# Altium PCB WackyRacerPCB.PcbDoc
Units mm, origin at the board's own origin, x right, y up, seen from the top; angles counter-clockwise.
Board outline 64 x 85 mm, 4 copper layers (Top Layer, Int1 (GND), Int2 (PWR), Bottom Layer), stack 1.369 mm thick; 109 components, 76 nets, 333 pads, 112 vias.
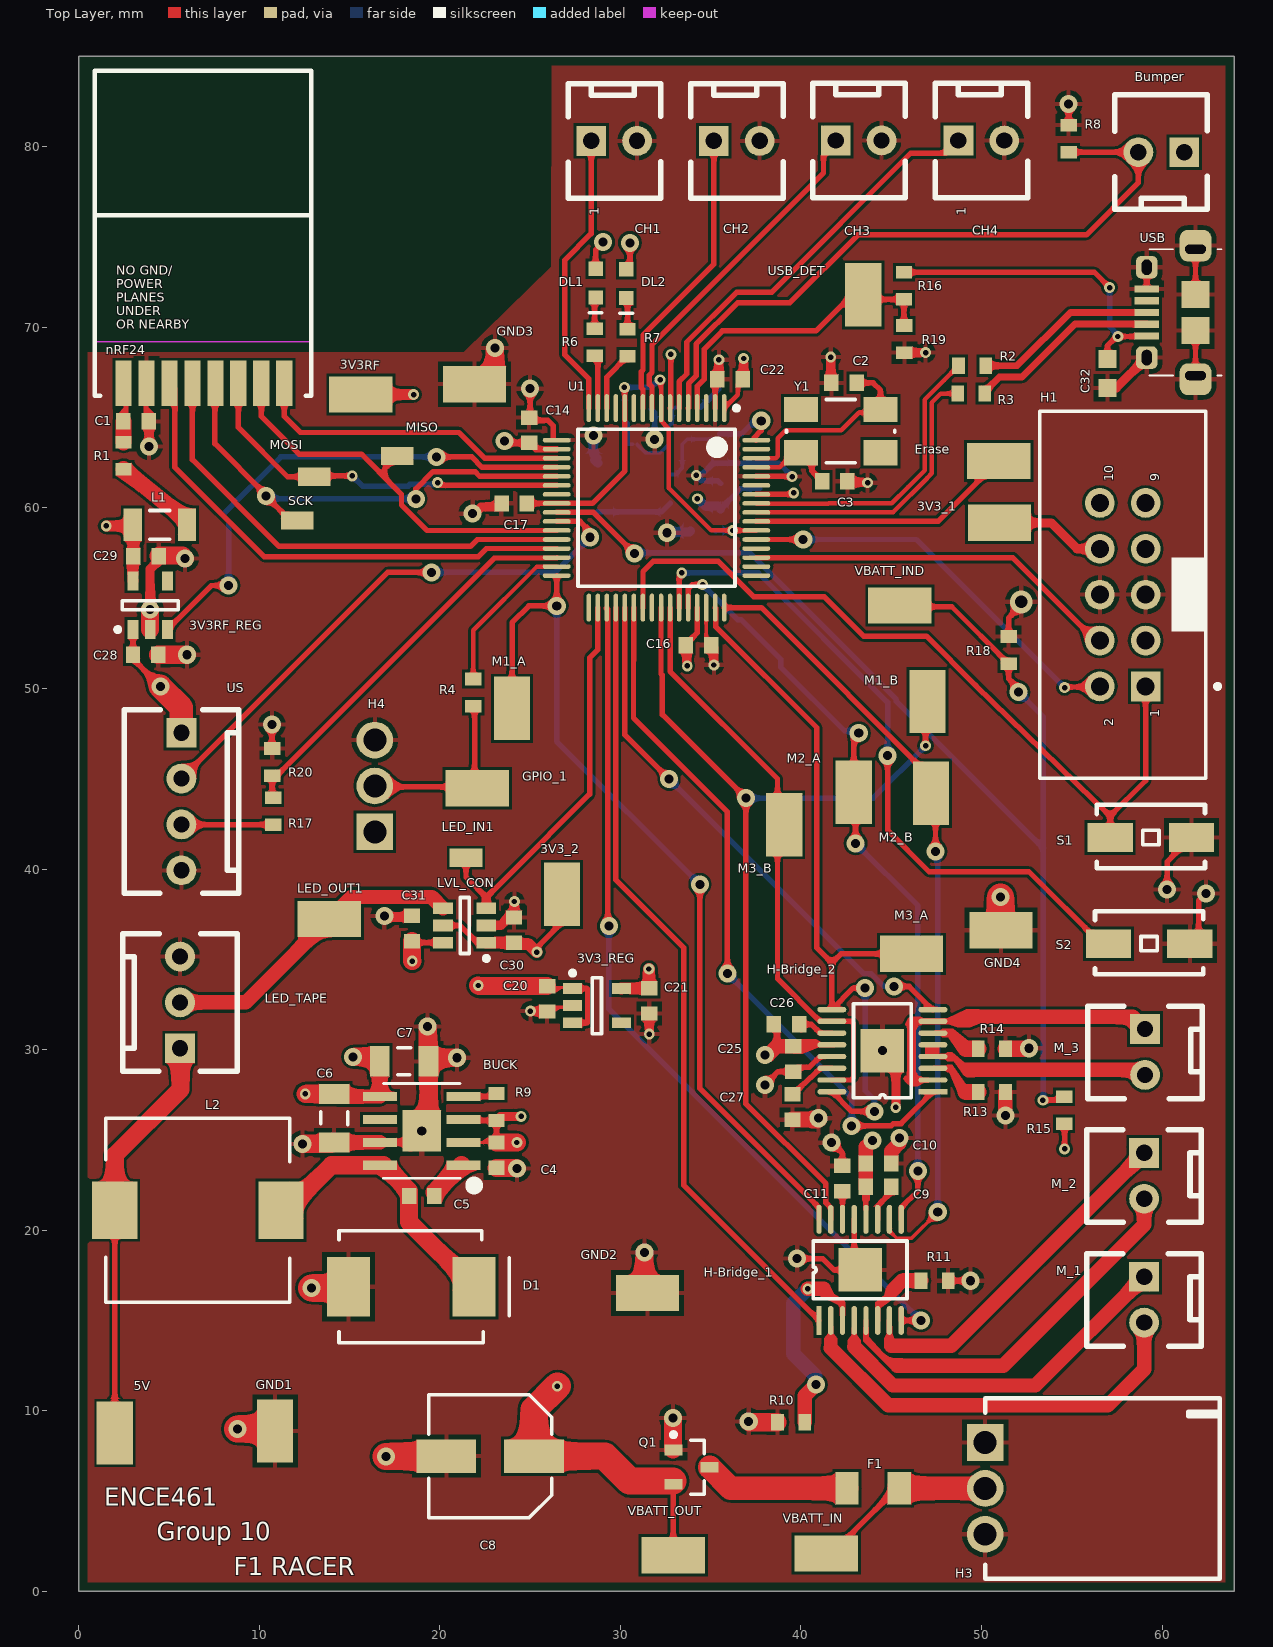
[diagram p0: Top Layer view]
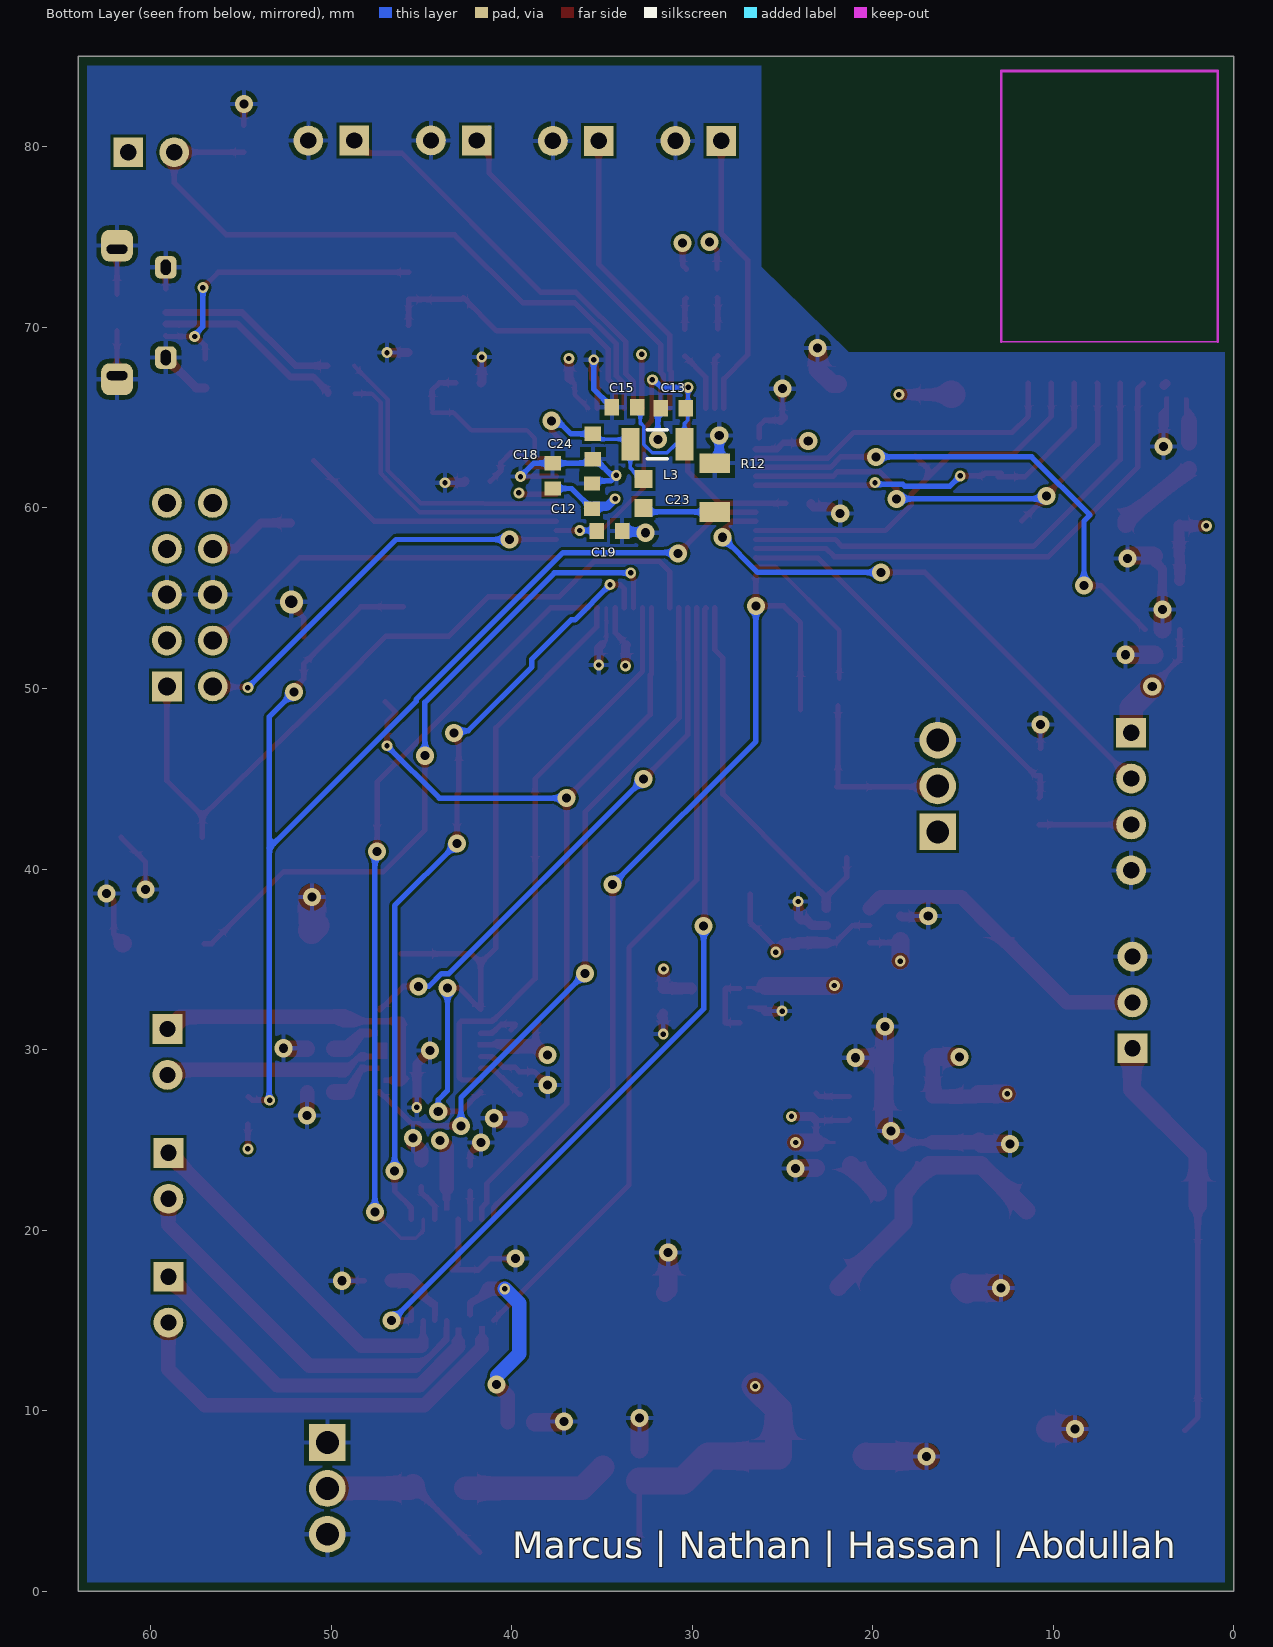
[diagram p1: Bottom Layer view, seen from below]
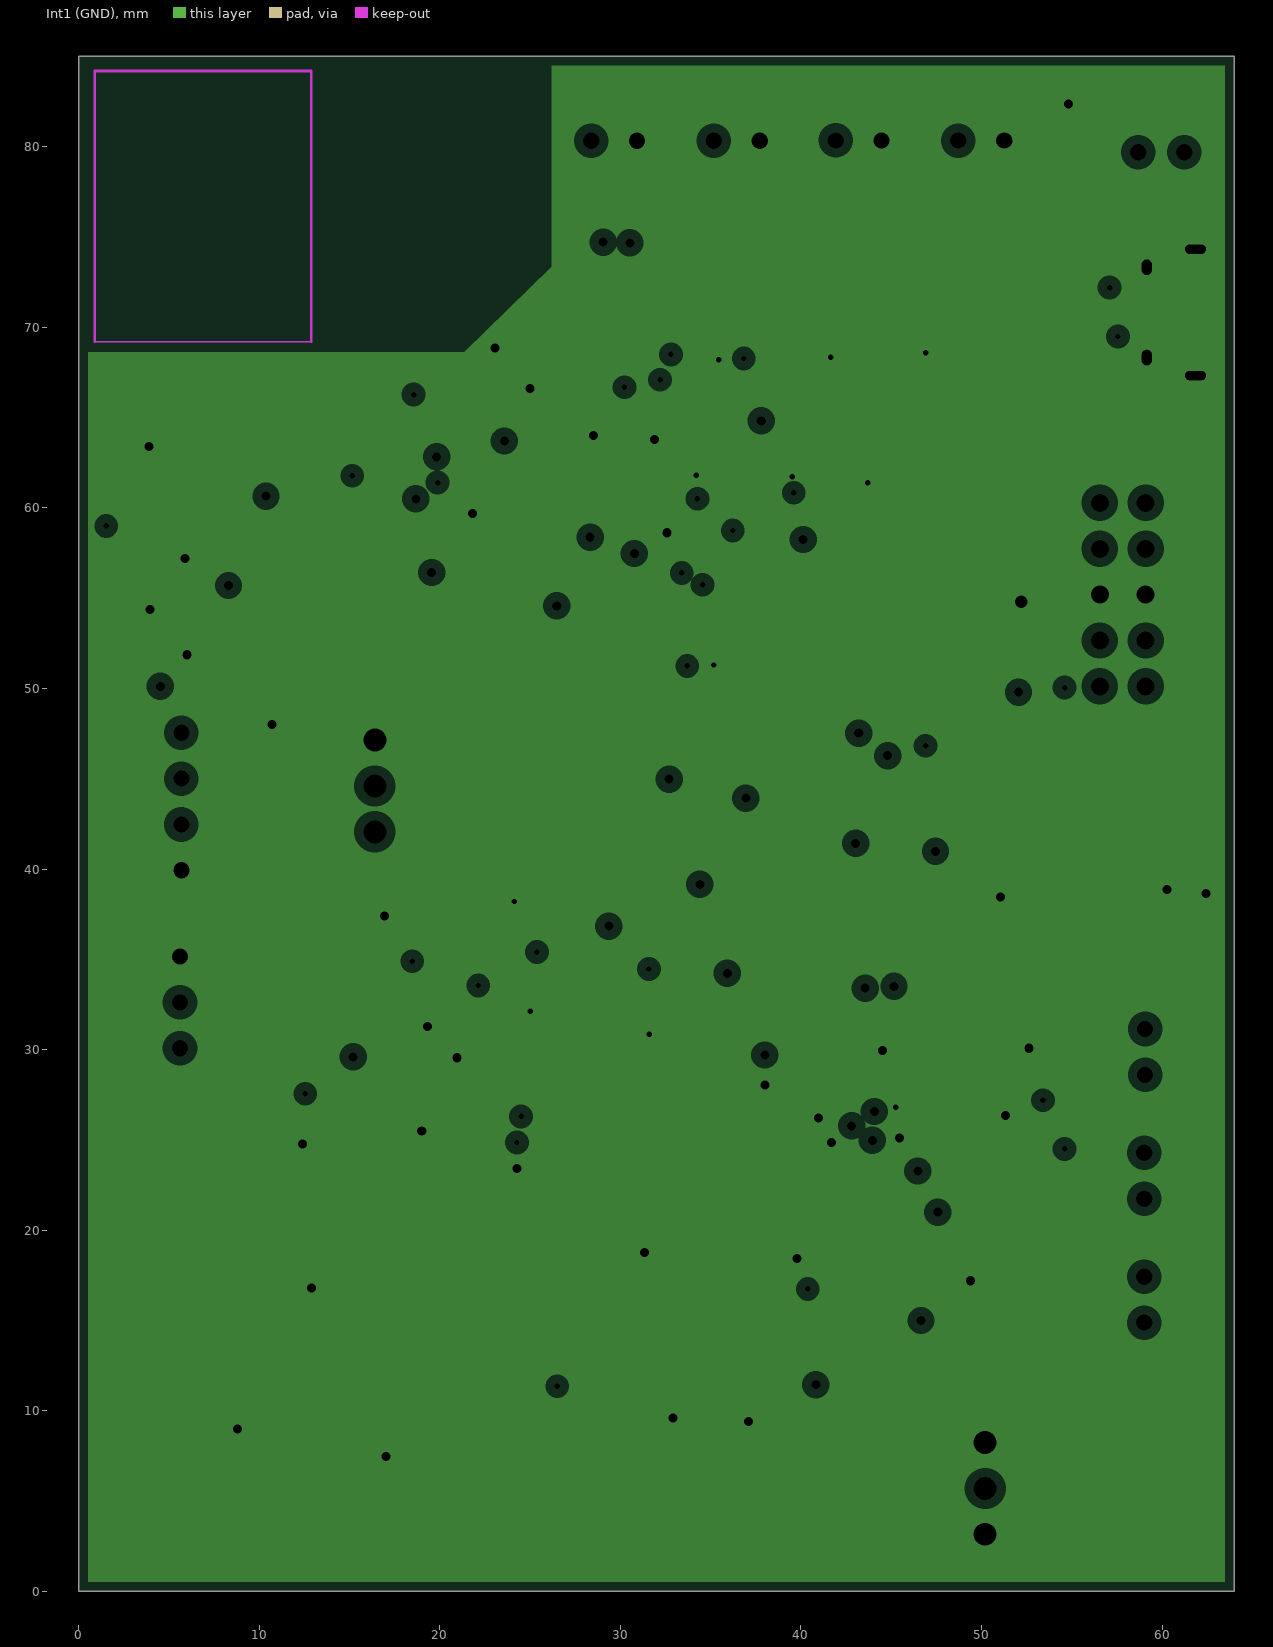
[diagram p2: Int1 (GND), clearances drawn from the general rule]
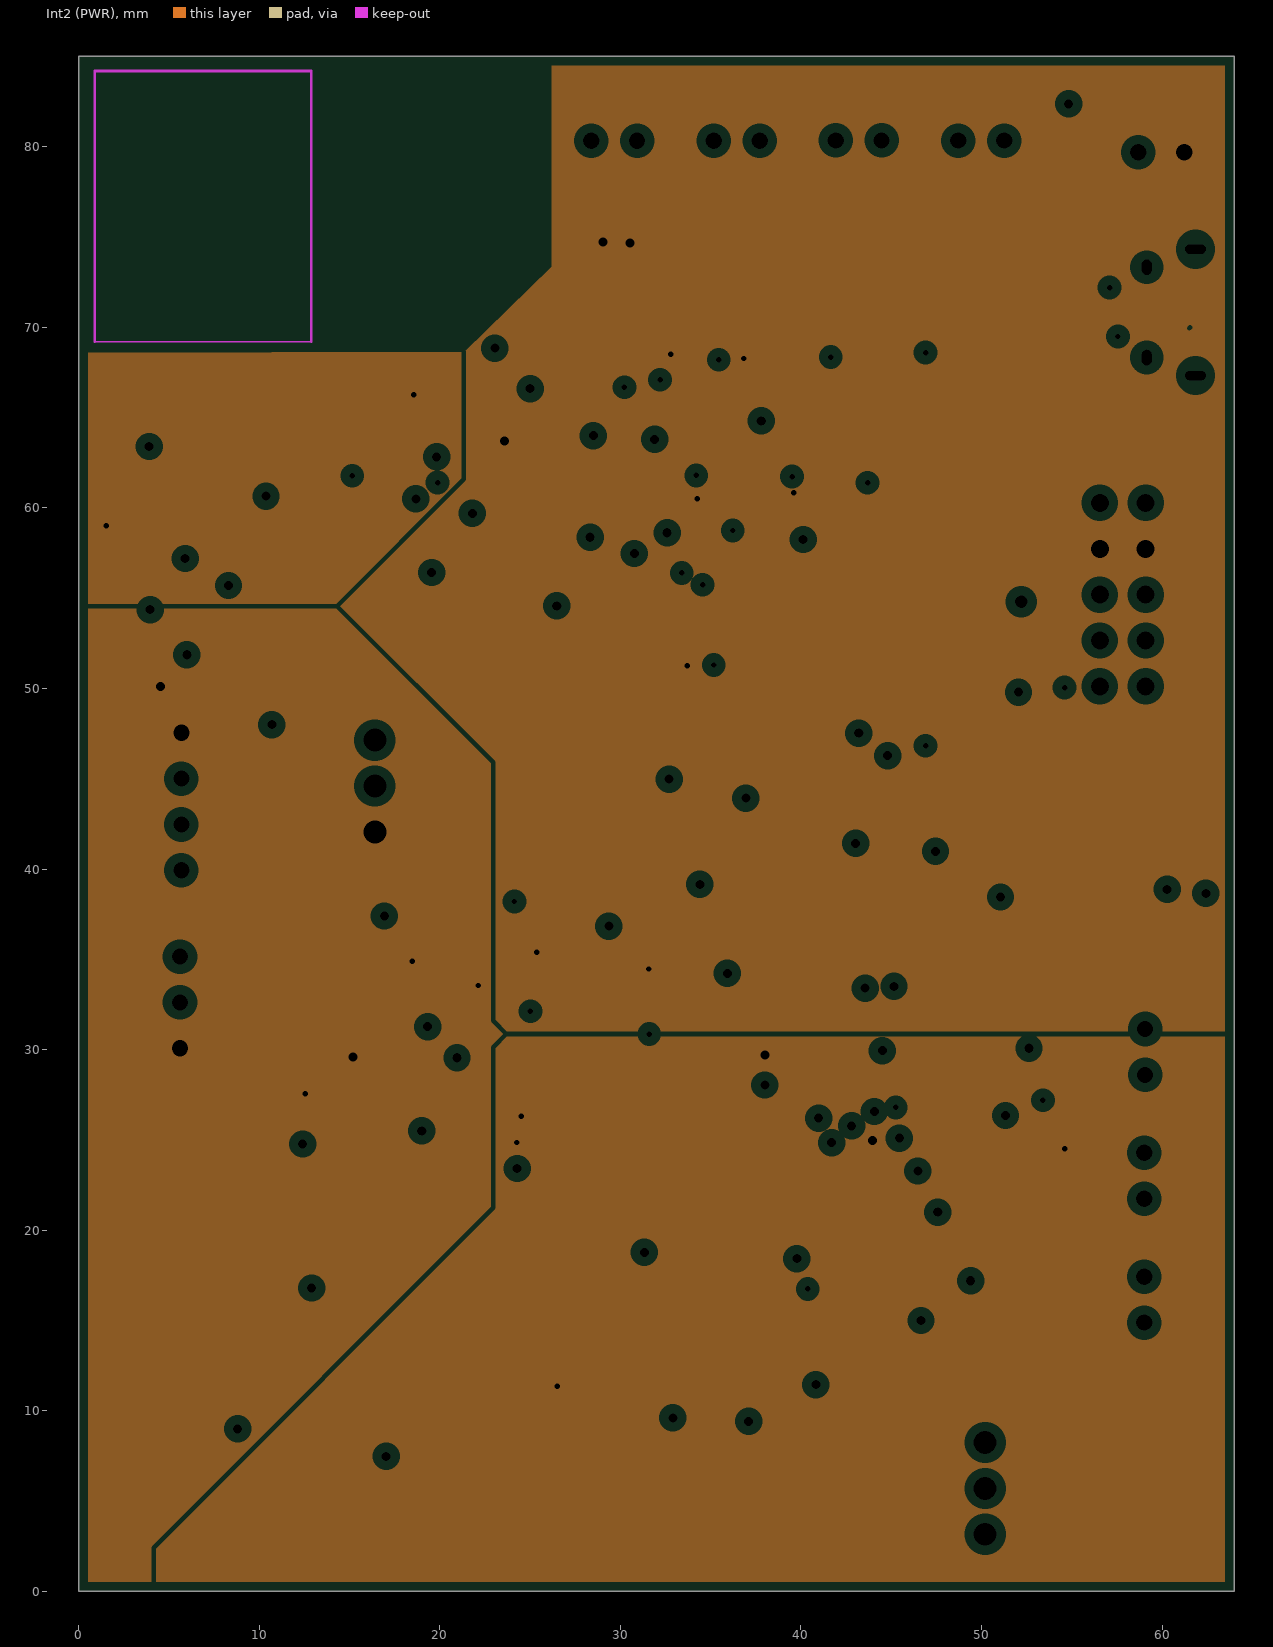
[diagram p3: Int2 (PWR), clearances drawn from the general rule]

## Layer stack, top to bottom
Top Solder: solder mask 0.0254, SM-001, Dk 4
Top Layer: signal copper 0.035
Dielectric 1: prepreg 0.1295, PP-017, Dk 4.3
Dielectric 2: prepreg 0.1295, PP-017, Dk 4.3
Int1 (GND): plane copper 0.035, net GND
Dielectric 3: core 0.7112, Core-039, Dk 4.8
Int2 (PWR): plane copper 0.035, net (Multiple Nets)
Dielectric 4: prepreg 0.1295, PP-017, Dk 4.3
Dielectric 5: prepreg 0.1295, PP-017, Dk 4.3
Bottom Layer: signal copper 0.035
Bottom Solder: solder mask 0.0254, SM-001, Dk 4

## Board outline
0,85 64,85 64,0 0,0 0,85

## Design rules (kind name [scope] priority, off if disabled: settings)
BoardOutlineClearance [All] p1: gap=0.5
Clearance Min_Clearance_Circuit_Labs [All] p1: gap=0.15
DiffPairsRouting [All] p1: maxlimit=0.254 minlimit=0.254 mostfreqgap=0.254 toplayer_minwidth=0.381 toplayer_maxwidth=0.381 toplayer_prefwidth=0.381 bottomlayer_minwidth=0.381 bottomlayer_maxwidth=0.381 bottomlayer_prefwidth=0.381 maxuncoupledlength=12.7
FanoutControl Fanout_BGA [IsBGA] p1 off: bgadir=Out bgaviamode=Centered fanoutstyle=Auto fanoutdirection=Alternating viagrid=0.025 // Fanout_BGA (Default Rule)
HoleSize [All] p1: absolutevalues=TRUE maxlimit=10 minlimit=0.3 maxpercent=80.000 minpercent=20.000
MinimumAnnularRing [All] p1: minimumring=0.1
MinimumSolderMaskSliver [All] p1: minsoldermaskwidth=0.1
NetAntennae [All] p1: netantennaetolerance=1
PasteMaskExpansion [All] p1 off: expansion=0.2
PlaneClearance [All] p1: clearance=0.508
PlaneConnect [All] p1: planeconnectstyle=Relief reliefexpansion=0.508 reliefentries=4 reliefconductorwidth=0.254 reliefairgap=0.254
PolygonConnect [All] p1: connectstyle=Relief reliefconductorwidth=0.254 reliefentries=4 polygonreliefangle="90 Angle" airgapwidth=0.254
RoutingVias [All] p1: holewidth=0.5 width=1 viastyle="Through Hole" minholewidth=0.3 minwidth=0.6 maxholewidth=1 maxwidth=2
SMDNeckDown [All] p1 off: percent=50.000
SMDToCorner [All] p1: distance=98425
SMDToPlane [All] p1: distance=1968504
SilkToSolderMaskClearance SilkscreenOverComponentPads [IsPad] p1: minsilkscreentomaskgap=0.254 clearancetoexposedcopper=TRUE
SolderMaskExpansion [All] p1: expansion=0.102
ViasUnderSMD [All] p1: allowed=FALSE
Width [All] p1: maxlimit=2 minlimit=0.15 preferedwidth=0.3
21 further rules are at their usual default settings.

## Classes and differential pairs
component class TestPoints: 3V3_2 3V3RF 5V GND1 GND2 GND3 GND4 GPIO_1 LED_IN1 LED_OUT1 M1_A M1_B M2_A M2_B M3_A M3_B MISO MOSI SCK USB_DET VBATT_IN VBATT_IND VBATT_OUT
component class Power: 3V3_REG 3V3RF_REG BUCK C4 C5 C6 C7 C8 C9 C10 C11 C12 C13 C14 C15 C16 C17 C18 C19 C20 C21 C22 C23 C24 C25 C26 C27 C28 C29 C30 C31 D1 F1 H-Bridge_1 H-Bridge_2 L2 L3 LVL_CON Q1 R9 R10 R11 R12 R13 R14 R15 R16 R17 R18 R19 R20
component class MCU: 3V3_1 C1 C2 C3 C32 DL1 DL2 Erase H1 L1 nRF24 R1 R2 R3 R4 R6 R7 S1 S2 U1 USB Y1
component class Headers: Bumper CH1 CH2 CH3 CH4 H3 H4 LED_TAPE M_1 M_2 M_3 R8 US
differential pair D: +D_P -D_N

## Components (designator, comment, footprint, x,y, rotation, side; value= is the part's Value field where it differs from the comment)
3V3_1 "TP" TP_1206 51,59.175 r0 top
3V3_2 "TP" TP_1206 26.775,38.6 r270 top
3V3_REG "CAT6219-330TDGT3" SOT95P280X145-5N 28.702,32.436 r0 top
3V3RF "TP" TP_1206 15.625,66.275 r0 top
3V3RF_REG "CAT6219-330TDGT3" SOT95P280X145-5N 3.962,54.614 r90 top
5V "TP" TP_1206 2,8.775 r270 top
BUCK "ADP2302ARDZ-5.0 BUCK" RD_8_1 19,25.5 r180 top locked
Bumper "2 Pin Molex KK HDR" MOLEX_KK_2_HDR 61.225,79.7 r180 top
C1 "10uF" CAPC1608L 3.175,64.795 r180 top
C2 "27nF" CAPC1608L 42.388,66.926 r0 top
C3 "27nF" CAPC1608L 41.875,61.475 r180 top
C4 "10uF" CAPC1608L 23.139,24.155 r90 top
C5 "100nF" CAPC1608L 19,21.9 r180 top
C6 "22uF" CAPC3216L 14.15,26.2 r90 top
C7 "22uF" CAPC3216L 18.025,29.35 r180 top
C8 "100µF/25V" CAPAE6666X77M 22.791,7.486 r180 top
C9 "10nF" CAPC1608L 44.3,22.4 r180 top
C10 "10uF" CAPC1608L 44.3,23.7 r180 top
C11 "2.2uF" CAPC1608L 42.291,22.86 r90 top
C12 "100nF" CAPC1608L 35.55,60.65 r270 bottom
C13 "100nF" CAPC1608L 31.05,65.525 r0 bottom
C14 "100nF" CAPC1608L 24.95,64.3 r270 top
C15 "100nF" CAPC1608L 33.75,65.575 r0 bottom
C16 "100nF" CAPC1608L 34.325,52.4 r180 top
C17 "100nF" CAPC1608L 24.125,60.25 r180 top
C18 "100nF" CAPC1608L 37.725,61.775 r270 bottom
C19 "100nF" CAPC1608L 34.575,58.725 r180 bottom
C20 "1uF" CAPC1608L 25.944,32.812 r270 top
C21 "1uF" CAPC1608L 31.6,32.7 r90 top
C22 "100nF" CAPC1608L 36.075,67.125 r0 top
C23 "4.7uF" CAPC1608N 32.7,60.8 r90 bottom
C24 "100nF" CAPC1608L 35.5,63.4 r90 bottom
C25 "10uF" CAPC1608L 39.573,29.478 r90 top
C26 "100nF" CAPC1608L 39.2,31.4 r180 top
C27 "2.2uF" CAPC1608L 39.525,26.825 r270 top
C28 "1uF" CAPC1608L 3.708,51.867 r0 top
C29 "1uF" CAPC1608L 3.734,57.328 r180 top
C30 "100nF" CAPC1608L 24.108,36.616 r270 top
C31 "100nF" CAPC1608L 18.454,36.708 r270 top
C32 "4.7uF" CAPC1608N 56.975,67.45 r90 top
CH1 "2 Pin Molex KK HDR" MOLEX_KK_2_HDR 28.385,80.325 r0 top
CH2 "2 Pin Molex KK HDR" MOLEX_KK_2_HDR 35.175,80.325 r0 top
CH3 "2 Pin Molex KK HDR" MOLEX_KK_2_HDR 41.925,80.35 r0 top
CH4 "2 Pin Molex KK HDR" MOLEX_KK_2_HDR 48.717,80.34 r0 top
D1 "SCHOTTKY 30V 4A" SMC 18.415,16.866 r0 top
DL1 "Dark Green" WL-SMCW0603 28.625,71.65 r90 top
DL2 "Red" WL-SMCW0603 30.325,71.625 r90 top
Erase "TP" TP_1206 50.95,62.6 r0 top
F1 "5A" RESC3216N 44,5.7 r180 top
GND1 "TP" TP_1206 10.883,8.883 r270 top
GND2 "TP" TP_1206 31.495,16.515 r0 top
GND3 "TP" TP_1206 21.925,66.85 r0 top
GND4 "TP" TP_1206 51.078,36.611 r0 top
GPIO_1 "TP" TP_1206 22.075,44.475 r180 top
H1 "Header 5X2 Vert" IDC2.54-V10D 57.82,55.195 r90 top
H3 "Battery_HEADER_3pin" BATT_HEADER_3POS 50.2,5.7 r270 top
H4 "HEADER_3" HEADER_3POS 16.4,44.6 r90 top
H-Bridge_1 "DRV8833" HTSOP16#1 41,15 r90 top locked
H-Bridge_2 "DRV8833" HTSOP16#2 47.309,27.667 r180 top
L1 "1A max, Idc 0.3R," INDC3216L 4.496,59.055 r180 top
L2 "IND 5.2UH 6A" INDUCTOR5u2 6.6,21.1 r180 top
L3 "1A max, Idc 0.3R," INDC3216L 31.925,63.525 r180 bottom
LED_IN1 "=Value" TP_0603 21.45,40.625 r180 top
LED_OUT1 "TP" TP_1206 13.875,37.225 r0 top
LED_TAPE "3 Pin Molex KK Hdr" MOLEX_KK_3_HDR 5.613,30.074 r90 top
LVL_CON "SN74LVC1T45" SOT23-6_N 21.375,36.875 r180 top
M1_A "TP" TP_1206 24,48.9 r270 top
M1_B "TP" TP_1206 47,49.275 r270 top
M2_A "TP" TP_1206 42.925,44.25 r270 top
M2_B "TP" TP_1206 47.2,44.2 r270 top
M3_A "TP" TP_1206 46.126,35.306 r0 top
M3_B "TP" TP_1206 39.075,42.45 r90 top
M_1 "2 Pin Molex KK HDR" MOLEX_KK_2_HDR 59.004,17.424 r270 top
M_2 "2 Pin Molex KK HDR" MOLEX_KK_2_HDR 59.004,24.282 r270 top
M_3 "2 Pin Molex KK HDR" MOLEX_KK_2_HDR 59.055,31.14 r270 top
MISO "TP_0603" TP_0603 17.65,62.875 r180 top
MOSI "=Value" TP_0603 13.05,61.725 r180 top
nRF24 "nRF24 SMD" NRF24 0.886,66.2 r0 top
Q1 "SSM3J328R,LF" SOT23_L 33.942,6.876 r0 top
R1 "10R" RESC1608L 2.489,62.89 r270 top
R2 "27R" RESC1608L 49.475,67.875 r180 top
R3 "27R" RESC1608L 49.425,66.332 r180 top
R4 "100R" RESC1608L 21.85,49.775 r270 top
R6 "100R" RESC1608L 28.575,69.175 r270 top
R7 "1K3" RESC1608L 30.4,69.15 r270 top
R8 "100K" RESC1608L 54.825,80.45 r270 top
R9 "100K" RESC1608L 23.139,26.822 r270 top
R10 "0R" RESC1608L 39.453,9.365 r180 top
R11 "0R" RESC1608L 47.4,17.2 r180 top
R12 "1R" RESC3216L 28.75,61.125 r90 bottom
R13 "0R" RESC1608L 50.575,27.65 r0 top
R14 "0R" RESC1608L 50.575,30.05 r0 top
R15 "470K" RESC1608L 54.575,26.649 r270 top
R16 "270K" RESC1608L 45.7,72.3 r90 top
R17 "10K" RESC1608L 10.77,43.205 r270 top
R18 "270K" RESC1608L 51.5,52.125 r270 top
R19 "470K" RESC1608L 45.725,69.35 r90 top
R20 "10K" RESC1608L 10.719,45.923 r270 top
S1 "EVQPNF05M" EVQPNF05M 59.375,41.75 r0 top
S2 "EVQPNF05M" EVQPNF05M 59.284,35.865 r0 top
SCK "=Value" TP_0603 12.1,59.3 r180 top
U1 "ATSAM4S8BA-ANR" LQFP64_L 32,60 r270 top locked
US "Ultrasonic Sensor Connector" MOLEX_KK_4_HDR 5.69,47.549 r270 top
USB "JS_USB_MICRO_B" FCI_USB_10118194-0001LF 63.3,70.825 r90 top
USB_DET "TP" TP_1206 43.45,71.8 r90 top
VBATT_IN "TP" TP_1206 41.4,2.1 r180 top
VBATT_IND "TP" TP_1206 45.475,54.6 r180 top
VBATT_OUT "TP" TP_1206 32.926,1.999 r180 top
Y1 "12MHz" 6.0X3.5-4 42.2,64.25 r0 top

## Footprints (in the part's own frame and the unit in brackets; to place one, negate y for a bottom-side part, rotate by r counter-clockwise, add the part's x,y. Pads: shape width x height; smd on the part's side, far side on the other; paste and mask are expansions set on the pad)
6.0X3.5-4 [mm] "4 SMD 6.0X3.5 mm No Lead Crystal"
  rect 1.9x1.4 smd: 1(-2.2,-1.2) 2(2.2,-1.2) 3(2.2,1.2) 4(-2.2,1.2)
  silkscreen extent -3,-1.75 3,1.75, body extent -3,-1.75 3,1.75, height 1.2
BATT_HEADER_3POS [mil]
  rect 80x80 hole 50: 1(-100,0)
  round 80 hole 50: 2(0,0) 3(100,0)
  silkscreen extent -197,0 197,512
CAPAE6666X77M [mm] "Aluminum Electrolytic Capacitor, Body 6.60x6.60x7.70mm, IPC Low Density"
  rect 3.3x1.85 smd: 1(2.425,0) 2(-2.425,0)
  silkscreen extent -3.4,-3.4 3.4,3.4, body extent -3.4,-3.4 3.4,3.4, height 7.7
CAPC1608L [mm] "Chip Capacitor, Body 1.6x0.8mm, IPC High Density"
  rect 0.8x0.9 smd: 1(-0.7,0) 2(0.7,0)
  body extent -0.87,-0.48 0.87,0.48, height 0.85
CAPC1608N [mm] "Chip Capacitor, Body 1.6x0.8mm, IPC Medium Density"
  rect 1x1 smd: 1(-0.8,0) 2(0.8,0)
  body extent -0.87,-0.48 0.87,0.48, height 0.85
CAPC3216L [mm] "Chip Capacitor, Body 3.2x1.6mm, IPC High Density"
  rect 1.1x1.7 smd: 1(-1.35,0) 2(1.35,0)
  silkscreen extent -0.35,-0.75 0.35,0.75, body extent -1.7,-0.9 1.7,0.9, height 1.35
EVQPNF05M [mm] "Panansonic light touch SMD push button switch"
  rect 2.5x1.6 smd: 1(-2.25,0) 2(2.25,0)
  silkscreen extent -3,-1.7 3,1.8, body extent -3,-1.7 3,1.8, height 5
FCI_USB_10118194-0001LF [mm] "Micro USB B Type Receptacle"
  rect 0.4x1.35 smd mask+0.07: 1(-1.3,4.15) 2(-0.65,4.15) 3(0,4.15) 4(0.65,4.15) 5(1.3,4.15)
  rrect50% 1.75x1.75 hole 0.5 slot 1.15 at 90 deg copper offset -0.2,0 paste+0 mask+0.1: 6(-3.5,1.45)
  rrect50% 1.25x1.2 hole 0.55 slot 0.85 at 0 deg: 6(-2.5,4.15) 6(2.5,4.15)
  rect 1.5x1.55 smd: 6(-1,1.45) 6(1,1.45)
  rrect50% 1.75x1.75 hole 0.5 slot 1.15 at 90 deg copper offset 0.2,0 paste+0 mask+0.1: 6(3.5,1.45)
  silkscreen extent -3.5,0 3.5,4
HEADER_3POS [mil]
  rect 80x80 hole 50: 1(-100,0)
  round 80 hole 50: 2(0,0) 3(100,0)
HTSOP16#1 [mm]
  rect 1.6x0.3 smd: 1(0,0)
  oval 1.6x0.3 smd: 2(0,-0.65) 3(0,-1.3) 4(0,-1.95) 5(0,-2.6) 6(0,-3.25) 7(0,-3.9) 8(0,-4.55) 9(5.6,-4.55) 10(5.6,-3.9) 11(5.6,-3.25) 12(5.6,-2.6) 13(5.6,-1.95) 14(5.6,-1.3) 15(5.6,-0.65) 16(5.6,0)
  rect 2.4x2.4 smd paste-0.5: 17(2.8,-2.275)
  silkscreen extent 1.2,-4.88 4.4,0.33
HTSOP16#2 [mm]
  rect 1.6x0.3 smd: 1(0,0)
  oval 1.6x0.3 smd: 2(0,-0.65) 3(0,-1.3) 4(0,-1.95) 5(0,-2.6) 6(0,-3.25) 7(0,-3.9) 8(0,-4.55) 9(5.6,-4.55) 10(5.6,-3.9) 11(5.6,-3.25) 12(5.6,-2.6) 13(5.6,-1.95) 14(5.6,-1.3) 15(5.6,-0.65) 16(5.6,0)
  rect 2.4x2.4 smd: 17(2.8,-2.275)
  silkscreen extent 1.2,-4.88 4.4,0.33
IDC2.54-V10D [mm] "Connector; IDC, Low Profile Male Header, Thru-Hole; 10 Position; Vertical; Pitch 2.54 mm; Body 20.32 x 9.2 x 9.45 mm (LxWxH)"
  rect 1.65x1.65 hole 1: 1(-5.08,-1.27)
  round 1.65 hole 1: 2(-5.08,1.27) 3(-2.54,-1.27) 4(-2.54,1.27) 5(0,-1.27) 6(0,1.27) 7(2.54,-1.27) 8(2.54,1.27) 9(5.08,-1.27) 10(5.08,1.27)
  silkscreen extent -10.16,-5.38 10.16,4.6, body extent -10.16,-4.6 10.16,4.6, height 9.45
INDC3216L [mm] "Chip Inductor, Body 3.2x1.6mm, IPC High Density"
  rect 1x1.8 smd: 1(-1.5,0) 2(1.5,0)
  silkscreen extent -0.55,-0.8 0.55,0.8, body extent -1.75,-0.95 1.75,0.95, height 1.9
INDUCTOR5u2 [mm]
  rect 2.5x3.2 smd: 1(-4.6,0) 2(4.6,0)
  silkscreen extent -5.1,-5.1 5.1,5.1
LQFP64_L [mm] "Thin QFP, 64-Leads, Body 10x10mm, Pitch 0.5mm, IPC High Density"
  oval 1.55x0.25 smd mask+0.07: 1(-5.525,3.75) 2(-5.525,3.25) 3(-5.525,2.75) 4(-5.525,2.25) 5(-5.525,1.75) 6(-5.525,1.25) 7(-5.525,0.75) 8(-5.525,0.25) 9(-5.525,-0.25) 10(-5.525,-0.75) 11(-5.525,-1.25) 12(-5.525,-1.75) 13(-5.525,-2.25) 14(-5.525,-2.75) 15(-5.525,-3.25) 16(-5.525,-3.75) 33(5.525,-3.75) 34(5.525,-3.25) 35(5.525,-2.75) 36(5.525,-2.25) 37(5.525,-1.75) 38(5.525,-1.25) 39(5.525,-0.75) 40(5.525,-0.25) 41(5.525,0.25) 42(5.525,0.75) 43(5.525,1.25) 44(5.525,1.75) 45(5.525,2.25) 46(5.525,2.75) 47(5.525,3.25) 48(5.525,3.75)
  oval 0.25x1.55 smd mask+0.07: 17(-3.75,-5.525) 18(-3.25,-5.525) 19(-2.75,-5.525) 20(-2.25,-5.525) 21(-1.75,-5.525) 22(-1.25,-5.525) 23(-0.75,-5.525) 24(-0.25,-5.525) 25(0.25,-5.525) 26(0.75,-5.525) 27(1.25,-5.525) 28(1.75,-5.525) 29(2.25,-5.525) 30(2.75,-5.525) 31(3.25,-5.525) 32(3.75,-5.525) 49(3.75,5.525) 50(3.25,5.525) 51(2.75,5.525) 52(2.25,5.525) 53(1.75,5.525) 54(1.25,5.525) 55(0.75,5.525) 56(0.25,5.525) 57(-0.25,5.525) 58(-0.75,5.525) 59(-1.25,5.525) 60(-1.75,5.525) 61(-2.25,5.525) 62(-2.75,5.525) 63(-3.25,5.525) 64(-3.75,5.525)
  silkscreen extent -5.65,-4.35 4.35,4.55, body extent -5,-5 5,5, height 1.6
MOLEX_KK_2_HDR [mil] "MOLEX_KK_2_HDR"
  rect 65x65 hole 35.43: 1(0,0)
  round 65 hole 35.43: 2(100,0)
  silkscreen extent -50,-125 152,125, body extent -44,-121 146,119, height 630
MOLEX_KK_3_HDR [mil] "MOLEX_KK_3_HDR"
  rect 65x65 hole 35.43: 1(0,0)
  round 65 hole 35.43: 2(100,0) 3(200,0)
  silkscreen extent -50,-125 250,125, body extent -44,-120 244,119, height 630
MOLEX_KK_4_HDR [mil] "MOLEX_KK_4_HDR"
  rect 65x65 hole 35.43: 1(0,0)
  round 65 hole 35.43: 2(100,0) 3(200,0) 4(300,0)
  silkscreen extent -50,-125 350,125, body extent -44,-119 343,119, height 630
NRF24 [mm]
  rect 0.9x2.5 smd: 1(1.6,0.7) 2(2.871,0.7) 3(4.143,0.7) 4(5.414,0.7) 5(6.686,0.7) 6(7.957,0.7) 7(9.229,0.7) 8(10.5,0.7)
  Keep-Out Layer lines w0.1: 0,3 12,3
  Keep-Out Layer lines w0.15: 0,3 0,18 12,18 12,3
  silkscreen extent 0,0 12,18
RD_8_1 [mil]
  rect 74x20 smd paste+0 mask+0: 1(-91,75) 2(-91,25) 3(-91,-25) 4(-91,-75) 5(91,-75) 6(91,-25) 7(91,25) 8(91,75)
  rect 84.65x90 smd paste-44.5 mask+0: EPAD(0,0)
  silkscreen extent -118,-104 83,123, body extent 0,0 10,10, height 10
RESC1608L [mm] "Chip Resistor, Body 1.6x0.8mm, IPC High Density"
  rect 0.7x0.9 smd: 1(-0.75,0) 2(0.75,0)
  body extent -0.85,-0.48 0.85,0.48, height 0.9
RESC3216L [mm] "Chip Resistor, Body 3.1x1.6mm, IPC High Density"
  rect 1.1x1.7 smd: 1(-1.35,0) 2(1.35,0)
  body extent -1.68,-0.87 1.68,0.87, height 2.54
RESC3216N [mm] "Chip Resistor, Body 3.2x1.6mm, IPC Medium Density"
  rect 1.3x1.8 smd: 1(-1.45,0) 2(1.45,0)
  body extent -1.68,-0.87 1.68,0.87, height 0.71
SMC [mm] "DO-214-AB/SMC; 2 C-Bend Leads; Body 7.9 x 5.9 mm, inc. leads (LxW)"
  rect 2.4x3.3 smd: 1(-3.475,0) 2(3.475,0)
  silkscreen extent -4,-3.1 5.42,3.1
SOT23-6_N [mm]
  rect 1.1x0.65 smd: 1(-1.2,0.95) 2(-1.2,0) 3(-1.2,-0.95) 4(1.2,-0.95) 5(1.2,0) 6(1.2,0.95)
  silkscreen extent -1.33,-1.55 0.25,1.95, body extent -0.9,-1.55 0.9,1.55, height 1.45
SOT23_L [mm] "SOT23, 3-Leads, Body 2.9x1.3mm, Pitch 0.95mm, Lead Span 2.3mm, IPC High Density"
  rect 1x0.6 smd: 1(-1,0.95) 2(-1,-0.95) 3(1,0)
  silkscreen extent -1.12,-1.5 0.7,1.92, body extent -0.7,-1.5 0.7,1.5, height 1.1
SOT95P280X145-5N [mm] "SOT23, 5-Leads, Body 2.90x2.80mm, Pitch 0.95mm, IPC Medium Density"
  rect 1.05x0.6 smd: 1(-1.35,0.95) 2(-1.35,0) 3(-1.35,-0.95) 4(1.35,-0.95) 5(1.35,0.95)
  silkscreen extent -1.47,-1.55 0.25,1.92, body extent -0.87,-1.52 0.87,1.53, height 1.45
TP_0603 [mm] "TestPoint 0603"
  rect 1.8x1 smd: 1(0,0)
  body extent -1,-0.6 1,0.6, height 0.9
TP_1206 [mm] "Test Point Pad"
  rect 3.5x2 smd: 1(0,0)
  body extent -1.62,-0.85 1.63,0.8, height 2
WL-SMCW0603 [mm] "2.4 x 0.8 x 0.7mm LED"
  rect 0.8x0.8 smd: 1(0,0) 2(1.6,0)
  silkscreen extent -0.85,-0.35 -0.85,0.35

## Part data
3V3_1 3V3_2 3V3RF 5V Erase GND1 GND2 GND3 GND4 GPIO_1 LED_OUT1 M1_A M1_B M2_A M2_B M3_A M3_B USB_DET VBATT_IN VBATT_IND VBATT_OUT: library part TP_1206, "Test-Point 3.3x1.6x2.1mm SMD"
3V3_REG 3V3RF_REG: library part SV_CAT6219-330TDGT3, "IC REG LIN 3.3V 500MA TSOT23-5"
BUCK: library part ADP2302ARDZ-5.0-R7, "IC REG BUCK 5V 2A 8SOIC"
Bumper CH1 CH2 CH3 CH4 M_1 M_2 M_3: library part JA_MOLEX_KK_2POS, "CONN HEADER 2POS 2.54mm VERT_Thru Hole"
C1 C4 C10 C25: library part CC_10uF_0603, "CAP CER 10UF X5R +-20% 6V3 0603"
C2 C3: library part CC_27nF_0603, "CAP CER 27nF X7R +-10% 50V 0603"
C5 C12 C13 C14 C15 C16 C17 C18 C19 C22 C24 C26 C30 C31: library part CC_100nF_0603, "CAP CER 100nF X7R +-10% 50V 0603"
C6 C7: library part CC_22uF_1206, "CAP CER 22uF Y5V -20% +80% 10V 1206"
C8: library part CA_100uF_25V, "CAP ALUM 100UF 25V 20% SMD"
C9: library part CC_10nF_0603, "CAP CER 10nF X7R +-10% 50V 0603"
C11 C27: library part CC_2.2uF_0603, "CAP CER 2.2uF X5R +-20% 10V 0603"
C20 C21 C28 C29: library part CC_1uF_0603, "CAP CER 1uF Y5V -20% +80% 16V 0603"
C23 C32: library part CC_4.7uF_0603, "CAP CER 4.7uF X5R +-20%  10V 0603"
D1: library part MBRS330T3G, "DIODE SCHOTTKY 30V 4A SMC"
DL1: library part DL_150060GS75000, "LED Dk Green 430mcd 0603 SMD"
DL2: library part DL_150060RS75000, "LED Red 250mcd 0603 SMD"
F1: library part FS_Fuse_5.0A, "Fuse 5.0A Fast Acting 1206 SMD"
H1: library part JA_HDR_IDC_5X2_VERT, "IDC Header, 2,54mm, 10-Pin, Vert"
H3 H4: "3Pin Header 2.54mm spacing"
H-Bridge_1 H-Bridge_2: "Dual H-Bridge Motor Driver 1.5A"
L1 L3: library part IN_Ferrite-Bead, "Ferrite Bead, Rdc 0.3R, Z100MHZ 600R, Imax 1A, SMD 1206"
L2: library part CDRH104RNP-5R2NC, "FIXED IND 5.2UH 6A 22 MOHM SMD"
LED_IN1 MOSI SCK: library part TP_0603, "Test Point 1.65X0.9X1.2mm SMD"
LED_TAPE: library part JA_MOLEX_KK_3POS, "CONN HEADER 3POS 2.54mm VERT_Thru Hole"
LVL_CON: "1.8V - 5V level converter"
MISO: "Test Point 1.65X0.9X1.2mm SMD"
nRF24: library part NRF24, "nRF24 SMD Module"
Q1: library part TM_SSM3J328R, "MOSFET P-CH 20V 6A SOT23-3"
R1: library part RS_10R, "RES 10 OHM 1/10W 5% 0603 SMD"
R2 R3 R15 R16: library part RS_27R, "RES 27 OHM 1/10W 5% 0603 SMD"
R4 R6: library part RS_100R, "RES 100 OHM 1/10W 5% 0603 SMD"
R7: library part RS_1K3, "RES 1.3K OHM 1/10W 5% 0603 SMD"
R8 R9: library part RS_100K, "RES 100K OHM 1/10W 5% 0603 SMD"
R10 R11 R13 R14: library part RS_0R0, "RES 0.0 OHM 1/10W 5% 0603 SMD"
R12: library part RT_1R, "RES 1R OHM 1/4W 5% 1206 SMD"
R17 R20: library part RS_10K, "RES 10.0K OHM 1/10W 5% 0603 SMD"
R18 R19: library part RS_47R, "RES 47 OHM 1/10W 5% 0603 SMD"
S1 S2: library part WS_EVQPNF05M, "Panasonic 6 x 3.5mm SMD Light Touch Switch Type SMD"
U1: library part SE_ATSAM4S16BA-MU, "IC MCU 32BIT 512KB FLASH 64LQFP"
US: library part JA_MOLEX_KK_4POS, "CONN HEADER 4POS 2.54mm VERT_Thru Hole"
USB: library part JS_USB_MICRO_B_SMT, "CONN USB MICRO B RECPT SMT R/A"
Y1: library part XT_CRYSTAL_12MHz_18pF, "CRYSTAL 12MHZ 18PF 6X3.5mm SMD"

## Via types
v1: diameter 1, hole 0.5, Top Layer to Bottom Layer, 71 vias
v2: diameter 0.6, hole 0.3, Top Layer to Bottom Layer, tented both sides, 23 vias
v3: diameter 0.6, hole 0.3, Top Layer to Bottom Layer, 17 vias
v4: diameter 1.27, hole 0.711, Top Layer to Bottom Layer, 1 vias

## Nets (pads, with @x,y where several pads share a name; then routed paths per layer and width w, separated by ;. In a path a pad name is that pad's centre, name@x,y a point inside that pad or via, vN(x,y) a via of type N, cw(c..) or ccw(c..) an arc to the next point about the centre after c; other vN are vias at no path point)
3V3: 3V3_1.1 3V3_2.1 3V3_REG.5 Bumper.1 C12.2 C14.2 C16.2 C18.2 C21.2 C22.2 C30.2 DL1.2 DL2.2 H1.7 H1.8 LVL_CON.1 LVL_CON.5 U1.1 U1.7 U1.18 U1.45 U1.58 | length 39.3
  Top Layer w0.25: U1.1 36.5,66.275 36.5,66.85 C22.2
  Top Layer w0.3: LVL_CON.5 21.125,36.875 22.075,35.925 LVL_CON.1 ; v2(25.375,35.4) 25.375,35.65 26.775,37.05 3V3_2.1 ; DL1.2 28.625,74.294 v1(29.044,74.713) ; DL2.2 30.525,73.425 v1(30.525,74.675) ; U1.7 32.8,65.575 v2(32.8,68.5) ; C16.2 33.625,52.45 34.25,53.075 U1.45 ; U1.58 39.434,60.75 39.517,60.833 v3(39.599,60.833)
  Top Layer w0.35: v1(23.571,63.703) 23.674,63.6 C14.2 25.304,63.246 U1.18@26.471,63.246
  Top Layer w0.5: C16.2 33.681,52.344 33.681,51.269 v3(33.7,51.25) ; C22.2 36.825,67.175 v3(36.825,68.275) ; 3V3_1.1@52.25,59.175 53.86,59.175 55.3,57.735 H1.8
  Top Layer w0.65: LVL_CON.1 24.108,35.925 C30.2 24.183,35.841 24.934,35.841 v2(25.375,35.4) ; 3V3_REG.5 C21.2 31.58,33.42 v2(31.58,34.463)
  Bottom Layer w0.3: C12.2 36.675,61.075 C18.2
  Bottom Layer w0.5: v3(34.265,60.503) 34.292,60.503 34.694,60.1 35.4,60.1 C12.2
3V3RF: 3V3RF.1 3V3RF_REG.5 C29.2 L1.2 | length 7.6
  Top Layer w0.6: v2(1.525,59) 2.941,59 L1.2 3.034,59.017 C29.2 2.996,57.29 2.996,55.98 3V3RF_REG.5 ; 3V3RF.1@15.675,66.275 v2(18.55,66.275)
  Top Layer w1.5: 3V3RF.1 15.65,66.3 3V3RF.1@15.675,66.275
5V: 3V3_REG.1 3V3_REG.3 3V3RF_REG.1 5V.1 BUCK.5 C6.2 C7.2 C20.1 C28.1 C31.2 H4.1 L2.2 LED_TAPE.1 LVL_CON.6 US.1 | length 48
  Top Layer w0.3: L2.2@2,21.365 2,9.633 5V.1@2.718,8.915 ; 3V3RF_REG.1 3.008,53.26 C28.1 3.008,51.627 3.585,51.05 v1(4.521,50.114) ; C6.2 C6.2@14.295,27.405 ; BUCK.5@16.675,27.419 BUCK.5 ; C31.2 18.537,35.925 LVL_CON.6 ; C20.1@25.856,33.6 C20.1 C20.1@25.948,33.508 ; 3V3_REG.3 28.177,31.486 28.177,33.386 3V3_REG.1
  Top Layer w0.8: C6.2@14.295,27.405 BUCK.5 ; BUCK.5@16.675,27.419 C7.2
  Top Layer w1: L2.2@2,21.365 2,24.149 5.639,27.788 5.639,30.048 LED_TAPE.1 ; v2(12.55,27.55) C6.2 ; v1(15.2,29.6) 16.575,29.6 16.675,29.5 C7.2 ; C31.2 18.454,34.921 v2(18.475,34.9) ; v2(22.125,33.55) 22.163,33.512 C20.1
  Top Layer w1.3: v1(4.521,50.114) 5.69,48.946 US.1
D_N: R3.1 USB.2 | length 10.6
  Top Layer w0.381: R3.1@50.175,66.325 R3.1 50.175,66.432 50.983,67.24 52.238,67.24 53.433,68.435 54.671,69.673 55.181,70.183 59.142,70.183 USB.2
D_P: R2.1 USB.3 | length 10.1
  Top Layer w0.381: R2.1 51.975,67.875 54.918,70.818 59.142,70.818 USB.3
GND: 3V3_REG.2 3V3RF_REG.2 BUCK.7 BUCK.EPAD C1.1 C2.1 C3.1 C4.1 C6.1 C7.1 C8.1 C10.1 C11.2 C12.1 C13.2 C14.1 C15.2 C16.1 C17.2 C18.1 C19.2 C20.2 C21.1 C22.1 C24.1 C25.1 C27.2 C28.2 C29.1 C30.1 C31.1 C32.1 CH1.2 CH2.2 CH3.2 CH4.2 D1.1 GND1.1 GND2.1 GND3.1 GND4.1 H1.5 H1.6 H3.1 H3.3 H4.3 H-Bridge_1.13 H-Bridge_1.17 H-Bridge_2.13 H-Bridge_2.17 LED_TAPE.3 LVL_CON.2 nRF24.2 Q1.1 R8.1 R10.2 R11.1 R12.2 R13.2 R14.2 R18.1 R19.1 R20.1 S1.2 S2.2 U1.2 U1.17 U1.46 U1.60 US.4 USB.5 USB.6 | length 124.4
  Top Layer w0.2: U1.46 34.75,52.675 C16.1
  Top Layer w0.3: v1(10.7,48) 10.7,46.692 R20.1 ; C6.1@14.1,24.9 C6.1@14.135,24.865 ; BUCK.7 BUCK.EPAD@18.365,24.865 ; C14.1@25,65.05 v1(25,66.6) ; C14.1@25.1,64.85 25.98,64.85 26.273,64.557 U1.17@26.273,63.875 ; U1.2 35.25,67 C22.1 ; U1.60@37.532,61.743 39.501,61.743 v3(39.508,61.736) ; v1(37.998,28.042) 38.735,28.778 C25.1 39.823,29.028 40.471,29.028 41.06,29.617 H-Bridge_2.13 ; v1(39.773,18.423) 41.202,18.423 41.825,17.8 H-Bridge_1.17 42.95,18.125 H-Bridge_1.13 ; v1@42,24.573 42.291,24.282 C11.2 ; R11.1 v1(49.4,17.2) ; R18.1 51.5,53.9 52.2,54.6 v4(52.2,54.8) ; v1@52.6,30.05 v1(52.625,30.075) ; R8.1 v1(54.825,82.375) ; USB.5 USB.6@59.15,73.325 ; v1(60.275,38.875) 60.275,40.4 S1.2 ; S2.2@61.519,35.88 62.025,36.386 62.025,38.25 v1(62.425,38.65) ; USB.6@61.85,67.325 USB.6@61.85,69.825 ; USB.6@61.85,71.825 USB.6@61.85,74.325
  Top Layer w0.5: nRF24.2 nRF24.2@3.875,66.782 ; C1.1 3.906,64.764 3.9,64.758 v1(3.9,63.4) ; v1(3.962,54.364) 3.962,56.614 4.284,56.935 4.284,57.178 C29.1 ; v1(16.925,37.4) 16.983,37.342 18.387,37.342 C31.1 ; v1(21.8,59.7) 21.935,59.7 22.285,60.05 23.275,60.05 23.425,60.2 C17.2 ; LVL_CON.2 23.375,36.875 23.666,37.166 23.958,37.166 C30.1 24.119,37.327 24.119,38.191 v3(24.13,38.202) ; C14.1 C14.1@25.1,64.85 ; v3(25.019,32.131) 25.028,32.122 25.934,32.122 C20.2 ; v3(31.6,30.862) 31.6,31.718 31.73,31.848 31.589,31.989 C21.1 C21.1@31.62,32.02 ; C16.1 35.175,52.25 v3(35.175,51.3) ; C22.1 35.452,67.202 v3(35.452,68.202) ; v3(41.65,68.35) 41.65,66.963 C2.1 ; C3.1 42.639,61.411 43.669,61.411 v3(43.688,61.392) ; v1(44.509,29.942) 45.25,29.201 v3(45.25,26.8) ; R19.1 v3(46.9,68.6) ; C32.1 57.473,66.65 59.148,68.325 USB.6@59.15,68.325
  Top Layer w0.8: C6.1@14.135,24.865 BUCK.7 ; C10.1@45,23.866 45,24.375 45.45,24.825 v1(45.45,25.1) ; v1(51.325,26.35) R13.2
  Top Layer w0.9: C27.2 v1@40.628,26.125 ; R14.2 v1@52.6,30.05
  Top Layer w1: 3V3RF_REG.2 v1(3.962,54.364) ; C28.2 v1(5.992,51.867) ; C29.1 4.47,57.364 5.736,57.364 v1(5.9,57.2) ; v1(12.4,24.773) 13.973,24.773 C6.1@14.1,24.9 ; BUCK.EPAD@18.365,24.865 v1(19,25.5) 19.375,25.875 C7.1 ; v1(19.325,31.275) 19.325,29.4 C7.1 ; v1(20.95,29.55) 19.425,29.55 19.375,29.5 C7.1 ; GND3.1 22.225,66.85 23.05,67.675 v1(23.05,68.85) ; C4.1 24.245,23.455 v1(24.285,23.415) ; v1(31.325,18.775) 31.325,16.685 GND2.1 ; Q1.1@32.907,7.861 v1(32.907,9.61) ; v1(37.107,9.41) 37.152,9.365 R10.2 ; v1@40.628,26.125 40.9,26.125 v1(40.975,26.2) ; CH4.2 CH4.2@51.382,80.465 ; S2.2@61.519,35.88 S2.2
  Top Layer w1.5: v1(8.8,9) GND1.1@10.2,9 ; v1(12.9,16.8) 14.674,16.8 14.774,16.7 D1.1 ; v1(17.025,7.475) 20.355,7.475 C8.1 ; v1(51.05,38.45) 51.05,37.078 50.831,36.859 GND4.1
  Bottom Layer w0.3: C13.2 31.7,65.475 31.9,65.275 v1(31.9,63.8) ; C15.2 35.452,66.577 v3(35.452,68.202) ; C12.1 35.4,61.5 34.5,61.5 v3(34.2,61.8) 34.47,61.8 35.145,62.475 C18.1 38.769,62.475 v3(39.508,61.736)
  Bottom Layer w0.5: v1(28.5,64) 28.5,62.975 28.7,62.775 28.575,62.65 R12.2 ; v1(32.588,58.623) 32.639,58.674 33.824,58.674 C19.2
  Bottom Layer w1: H1.6@56.55,55.05 H1.6
  other v1: 41.698,24.848
MCU_SLEEP: S2.1 U1.43 | length 38.3
  Top Layer w0.3: U1.43 33.25,56.169 33.397,56.316 v2(33.397,56.397) ; v1(44.8,46.275) 44.8,42.15 47.1,39.85 52.625,39.85 56.61,35.865 S2.1
  Bottom Layer w0.3: v2(33.397,56.397) 37.635,56.397 44.8,49.231 v1(44.8,46.275)
Net3V3RF_REG_3: 3V3RF_REG.3 U1.20 | length 28.5
  Top Layer w0.3: 3V3RF_REG.3 7.349,55.7 v1(8.3,55.7) ; v1(19.825,62.825) 21.773,62.825 22.348,62.25 U1.20
  Bottom Layer w0.3: v1(8.3,55.7) 8.3,59.276 7.975,59.601 11.199,62.825 v1(19.825,62.825)
NetBUCK_1: BUCK.1 C5.1 | length 2.2
  Top Layer w0.3: BUCK.1@21.195,23.595 BUCK.1
  Top Layer w1: C5.1@19.7,22.1 BUCK.1@21.195,23.595
NetBUCK_4: BUCK.4 R9.1 | length 1.9
  Top Layer w0.3: BUCK.4 22.972,27.405 R9.1
NetBUCK_8: BUCK.8 C5.2 D1.2 L2.1 | length 15.2
  Top Layer w1: L2.1@11.483,21.082 13.996,23.595 BUCK.8 16.882,23.595 18.3,22.177 18.3,22.1 C5.2 18.3,20.456 D1.2
NetBumper_2: Bumper.2 R8.2 U1.5 | length 37.5
  Top Layer w0.3: U1.5 33.775,65.55 33.775,66.889 34.2,67.314 34.2,69.064 36.486,71.35 39.375,71.35 43.15,75.125 55.8,75.125 58.685,78.01 Bumper.2 R8.2
NetC1_2: C1.2 nRF24.1 R1.1 | length 1.2
  Top Layer w0.9: C1.2@2.486,64.795 2.486,63.644 R1.1
NetC2_2: C2.2 U1.62 Y1.3 | length 11
  Top Layer w0.25: U1.62 38.6,62.75 38.713,62.863 38.713,63.863 39.151,64.3 42.225,64.3 43.2,65.275 Y1.3@44.4,65.275
  Top Layer w0.3: C2.2 43.999,66.926 44.4,66.525 Y1.3@44.4,65.475
NetC3_2: C3.2 U1.61 Y1.1 | length 4.9
  Top Layer w0.25: U1.61 38.814,62.25 Y1.1@39.614,63.05
  Top Layer w0.3: Y1.1@39.614,63.05 Y1.1 40.048,63.05 40.598,62.5 40.598,62.052 C3.2
NetC9_1: C9.1 H-Bridge_1.11 | length 2.1
  Top Layer w0.3: H-Bridge_1.11 44.25,21.35 45,22.1 C9.1
NetC11_1: C11.1 H-Bridge_1.14 | length 1.6
  Top Layer w0.3: C11.1 42.3,22.151 H-Bridge_1.14
NetC23_1: C23.1 R12.1 | length 4.2
  Bottom Layer w0.3: R12.1 32.275,59.775 C23.1@32.75,60.25
NetC23_2: C23.2 C24.2 L3.1 U1.64 | length 8.3
  Top Layer w0.3: U1.64 37.4,63.875 37.8,64.275 v1(37.8,64.825)
  Bottom Layer w0.2: C23.2@32.75,61.85 33.075,61.85 33.425,62.2 L3.1 33.7,63.8 C24.2@35.575,63.8
  Bottom Layer w0.3: C24.2 36.2,64.1 36.7,64.1 37.425,64.825 v1(37.8,64.825)
NetC26_1: C26.1 H-Bridge_2.11 | length 2.4
  Top Layer w0.3: C26.1@39.8,31.4 40.576,31.4 41.06,30.917 H-Bridge_2.11 ; C26.1@39.827,31.344 39.827,31.294 C26.1@40.021,31.1
NetC27_1: C27.1 H-Bridge_2.14 | length 2.8
  Top Layer w0.3: C27.1 39.575,27.525 40.15,28.1 40.169,28.1 40.5,28.431 40.524,28.431 41.06,28.967 H-Bridge_2.14
NetCH1_1: CH1.1 U1.16 | length 16
  Top Layer w0.3: U1.16 28.25,67.15 26.925,68.475 26.925,73.725 28.385,75.185 CH1.1
NetCH2_1: CH2.1 U1.10 | length 17.1
  Top Layer w0.3: U1.10 31.25,66.565 31.15,66.665 31.15,67.535 31.25,67.635 31.25,69.575 35.175,73.5 CH2.1 CH2.1@35.761,80.325
NetCH3_1: CH3.1 U1.9 | length 20.1
  Top Layer w0.3: U1.9 31.75,66.701 31.6,66.851 31.6,67.348 31.75,67.498 31.75,69.05 41.25,78.55 41.25,79.674 CH3.1
  Bottom Layer w0.3: CH3.1@41.25,81.025 CH3.1
NetCH4_1: CH4.1 U1.6 | length 23.5
  Top Layer w0.3: U1.6 33.25,67 33.675,67.425 33.675,69.175 36.45,71.95 38.389,71.95 46.078,79.64 48.017,79.64 CH4.1
NetDL1_1: DL1.1 R6.1 | length 1.7
  Top Layer w0.3: R6.1 28.575,71.6 DL1.1
NetDL2_1: DL2.1 R7.1 | length 1.8
  Top Layer w0.3: DL2.1 30.4,71.55 R7.1
NetErase_1: Erase.1 U1.55 | length 14.8
  Top Layer w0.3: U1.55 47.6,59.25 Erase.1
NetF1_2: F1.2 Q1.3 | length 8.1
  Top Layer w1.3: Q1.3 36.118,5.7 F1.2
NetGPIO_1_1: GPIO_1.1 H4.2 R4.2 | length 10.8
  Top Layer w0.3: H4.2@15.723,44.552 21.998,44.552 21.925,44.625 R4.2@21.925,49.034
NetH-Bridge_1_1: H-Bridge_1.1 U1.36 | length 44.1
  Top Layer w0.3: U1.36 29.75,39.4 33.5,35.65 33.5,22.5 H-Bridge_1.1
NetH-Bridge_1_2: H-Bridge_1.2 M_1.2 | length 22.1
  Top Layer w0.8: 41.65,13.475 44.825,10.3 57,10.3 59.004,12.304 M_1.2
NetH-Bridge_1_3: H-Bridge_1.3 R10.1 | length 9.6
  Top Layer w0.3: H-Bridge_1.3@42.3,15.325 H-Bridge_1.3@42.3,15.65
  Top Layer w0.8: R10.1 40.203,10.827 v1(40.825,11.448) ; v2(40.375,16.75) 41.25,16.75
  Bottom Layer w0.3: v1@40.794,11.448 v1(40.825,11.448) v1@41.082,11.705
  Bottom Layer w0.8: v2(40.375,16.75) 39.575,15.95 39.575,13.15 v1@40.787,11.938
NetH-Bridge_1_4: H-Bridge_1.4 M_1.1 | length 19.4
  Top Layer w0.8: 42.95,13.542 45.092,11.4 52.98,11.4 M_1.1
NetH-Bridge_1_5: H-Bridge_1.5 M_2.2 | length 19.1
  Top Layer w0.3: H-Bridge_1.5@43.6,14.236 H-Bridge_1.5
  Top Layer w0.8: 45.336,12.5 51.2,12.5 59.004,20.304 M_2.2
NetH-Bridge_1_6: H-Bridge_1.6 R11.2 | length 2.4
  Top Layer w0.3: H-Bridge_1.6 H-Bridge_1.6@44.25,15.65
  Top Layer w0.8: 45.1,16.7 45.613,17.213 R11.2@46.649,17.213
NetH-Bridge_1_7: H-Bridge_1.7 M_2.1 | length 19.1
  Top Layer w0.3: H-Bridge_1.7@44.9,14.293 H-Bridge_1.7
  Top Layer w0.8: 45,13.6 48.322,13.6 M_2.1
NetH-Bridge_1_8: H-Bridge_1.8 U1.35 | length 48.5
  Top Layer w0.3: U1.35 29.227,54.452 29.3,54.379 29.3,36.9 v1(29.363,36.837) ; H-Bridge_1.8@45.55,15.641 H-Bridge_1.8 v1(46.65,15)
  Bottom Layer w0.3: v1(29.363,36.837) 29.363,32.251 46.614,15 v1(46.65,15)
NetH-Bridge_1_9: H-Bridge_1.9 M2_A.1 U1.44 | length 43.3
  Top Layer w0.3: U1.44 33.75,55.514 33.986,55.75 v2(34.55,55.75) ; v1(43.025,41.425) 43.025,44.15 M2_A.1 42.925,47.525 v1(43.2,47.525) ; H-Bridge_1.9 45.55,21.25 46.475,22.175 v1(46.475,23.275)
  Bottom Layer w0.3: v2(34.55,55.75) 36.501,53.799 36.707,53.799 38.875,51.631 38.875,51.194 42.41,47.659 43.066,47.659 v1(43.2,47.525) ; v1(43.025,41.425) 46.475,37.975 v1(46.475,23.275)
NetH-Bridge_1_10: H-Bridge_1.10 M2_B.1 U1.48 | length 43.7
  Top Layer w0.2: H-Bridge_1.10 44.9,19.95 45.3,19.55 46.125,19.55 v1(47.575,21)
  Top Layer w0.3: U1.48 37.806,54.475 47.45,44.831 v1(47.45,40.975)
  Bottom Layer w0.3: v1(47.45,40.975) 47.575,40.85 v1(47.575,21)
NetH-Bridge_1_15: H-Bridge_1.15 M1_B.1 U1.41 | length 51.8
  Top Layer w0.3: U1.41 32.25,50.814 32.325,50.739 32.325,48.55 v1(36.95,43.925) 36.95,27 41.375,22.575 41.375,21.525 41.65,21.25 H-Bridge_1.15 ; v2(46.9,46.825) 46.9,48.18 46.402,48.677 M1_B.1
  Bottom Layer w0.3: v1(36.95,43.925) 44,43.925 v2(46.9,46.825)
NetH-Bridge_1_16: H-Bridge_1.16 M1_A.1 U1.32 | length 49.3
  Top Layer w0.3: M1_A.1@24,48.827 M1_A.1 24,53.642 24.933,54.575 v1(26.475,54.575) U1.32 ; v1(34.4,39.15) 34.4,27.85 41,21.25 H-Bridge_1.16
  Bottom Layer w0.3: v1(26.475,54.575) 26.475,47.075 v1(34.4,39.15)
NetH-Bridge_2_1: H-Bridge_2.1 U1.38 | length 39
  Top Layer w0.3: U1.38 30.75,51.572 30.725,51.547 30.725,48.37 35.927,43.168 v1(35.927,34.225) ; v1(42.802,25.776) 44.995,25.776 45.119,25.9 45.543,25.9 H-Bridge_2.1
  Bottom Layer w0.3: v1(35.927,34.225) 42.802,27.35 v1(42.802,25.776)
NetH-Bridge_2_2: H-Bridge_2.2 H-Bridge_2.7 M_3.1 | length 12.6
  Top Layer w0.3: 49.2,31.85 49.234,31.816
  Top Layer w0.5: 46.109,28.739 46.109,29.195 46.109,29.389 46.109,29.845 46.109,30.039 46.109,30.495 46.109,30.689 46.109,31.145
  Top Layer w0.8: 49.234,31.816 58.38,31.816 M_3.1
NetH-Bridge_2_3: H-Bridge_2.3 R13.1 | length 0.7
  Top Layer w0.9: 49.125,27.65 R13.1
NetH-Bridge_2_4: H-Bridge_2.4 H-Bridge_2.5 M_3.2 | length 9.9
  Top Layer w0.8: 49.275,28.875 58.78,28.875 M_3.2
NetH-Bridge_2_6: H-Bridge_2.6 R14.1 | length 0.7
  Top Layer w0.9: 49.125,30.05 R14.1
NetH-Bridge_2_8: H-Bridge_2.8 U1.37 | length 30.4
  Top Layer w0.3: U1.37 30.25,47.425 v1(32.7,44.975) ; v1(45.15,33.5) 45.993,33.5 47.293,32.2 H-Bridge_2.8
  Bottom Layer w0.3: v1(32.7,44.975) 43.469,34.206 43.881,34.206 44.587,33.5 v1(45.15,33.5)
NetH-Bridge_2_9: H-Bridge_2.9 H-Bridge_2.16 M3_A.1 U1.47 | length 41.7
  Top Layer w0.3: U1.47 35.275,54.45 35.275,53.424 40.875,47.824 40.875,35.63 41.71,34.795 ; H-Bridge_2.16 42.8,26.576 v1(44.061,26.576) ; v1(43.55,33.406) 42.89,33.406 41.71,32.225 41.71,34.795 ; M3_A.1 42.22,35.306 41.71,34.795
  Bottom Layer w0.3: v1(43.55,33.406) 43.55,27.733 44.061,27.222 v1(44.061,26.576)
NetH-Bridge_2_10: H-Bridge_2.10 H-Bridge_2.15 M3_B.1 U1.42 | length 32.5
  Top Layer w0.3: U1.42 32.75,50.95 38.7,45 38.7,42.45 38.7,33.926 41.06,31.567 H-Bridge_2.10 42.783,31.567 42.91,31.44 42.91,28.469 42.758,28.317 H-Bridge_2.15
NetL1_1: L1.1 R1.2 | length 4.8
  Top Layer w0.9: R1.2 5.994,59.306 5.994,59.056 L1.1
NetLED_IN1_1: LED_IN1.1 LVL_CON.3 U1.34 | length 21.9
  Top Layer w0.3: LED_IN1.1 21.45,39.55 22.575,38.425 23.83,39.68 28.3,44.15 28.3,51.7 28.75,52.15 U1.34
  Top Layer w0.5: LVL_CON.3 22.575,38.425
NetLED_OUT1_1: LED_OUT1.1 LED_TAPE.2 LVL_CON.4 | length 17.2
  Top Layer w0.8: LED_TAPE.2 9.264,32.614 15.102,38.452 19.548,38.452 19.575,38.425 LVL_CON.4
NetR2_2: R2.2 U1.57 | length 16.7
  Top Layer w0.25: U1.57 37.542,60.233 41.517,60.233 41.534,60.25 45.024,60.25 45.925,61.15 46.85,62.075 46.85,66 47.925,67.075 R2.2
NetR3_2: R3.2 U1.56 | length 16.2
  Top Layer w0.25: U1.56 44,59.75 45.1,59.75 47,61.65 47,61.659 47.25,61.909 47.25,65.834 47.748,66.332 R3.2
NetR4_1: R4.1 U1.31 | length 8.8
  Top Layer w0.25: R4.1@21.85,50.534 21.85,53.219 25.381,56.75 U1.31
NetR15_1: R15.1 R18.2 U1.25 VBATT_IND.1 | length 67.8
  Top Layer w0.3: U1.25 28.5,59.75 v1(30.775,57.475) ; VBATT_IND.1@46,54.525 48.35,54.525 51.5,51.375 51.5,50.539 52.05,49.989 v1(52.05,49.8) ; v2(53.4,27.2) 54.376,27.2 R15.1
  Bottom Layer w0.3: v1(30.775,57.475) 30.825,57.525 37.143,57.525 45.284,49.384 45.284,49.29 53.425,41.149 ; v1(52.05,49.8) 53.425,48.425 53.425,41.149 ; v2(53.4,27.2) 53.425,27.225 53.425,41.149
NetR16_1: R16.1 R19.2 U1.4 USB_DET.1 | length 17.2
  Top Layer w0.3: U1.4 34.25,66.727 34.65,67.127 34.65,68.8 35.65,69.8 40.825,69.8 42.675,71.65 42.775,71.55 R16.1 45.7,70.125 R19.2
NetR17_1: R17.1 R20.2 U1.30 | length 22
  Top Layer w0.3: R17.1 10.719,44.006 R20.2 10.973,45.173 23.025,57.225 26.45,57.225 U1.30
NetR17_2: R17.2 US.3 | length 5.1
  Top Layer w0.3: US.3 5.703,42.455 R17.2
NetU1_26: U1.26 US.2 | length 30.6
  Top Layer w0.3: US.2 17.106,56.425 v1(19.55,56.425) ; U1.26 27.775,59.25 28.325,58.7 v1(28.325,58.375)
  Bottom Layer w0.3: v1(19.55,56.425) 26.375,56.425 v1(28.325,58.375)
nRF_CE: nRF24.3 U1.29 | length 28.2
  Top Layer w0.3: nRF24.3 5.329,66.6 5.329,62.246 10.271,57.304 22.129,57.304 22.575,57.75 U1.29
nRF_CSN: nRF24.4 U1.28 | length 26.5
  Top Layer w0.3: nRF24.4 6.3,62.675 11.1,57.875 21.7,57.875 22.075,58.25 U1.28
nRF_IRQ: nRF24.8 U1.19 | length 17.9
  Top Layer w0.3: nRF24.8 11.386,65.068 12.279,64.175 21.059,64.175 22.484,62.75 U1.19
nRF_MISO: MISO.1 nRF24.7 U1.27 | length 23.5
  Top Layer w0.3: nRF24.7 10.114,65.061 12.2,62.975 15.65,62.975 17.526,61.099 ; MISO.1 16.95,62.175 16.95,61.675 17.876,60.749 17.876,60.172 19.298,58.75 U1.27
nRF_MOSI: MOSI.1 nRF24.6 U1.22 | length 21.8
  Top Layer w0.3: nRF24.6 8.843,64.457 11.575,61.725 MOSI.1 ; MOSI.1@12.875,61.925 13.772,61.925 13.922,61.775 v2(15.15,61.775) ; v3(19.876,61.403) 20.029,61.25 U1.22
  Bottom Layer w0.3: v2(15.15,61.775) 15.725,61.2 18.242,61.2 18.345,61.303 19.776,61.303 v3(19.876,61.403)
nRF_SCK: nRF24.5 SCK.1 U1.21 | length 26.5
  Top Layer w0.3: nRF24.5 7.544,66.872 7.544,63.556 v1@10.303,60.797 ; v1(10.378,60.647) SCK.1@11.752,59.273 ; v1(18.676,60.503) 18.676,61.051 19.627,62.003 21.958,62.003 22.211,61.75 U1.21
  Bottom Layer w0.3: v1@10.303,60.775 10.575,60.503 v1(18.676,60.503)
nRST: H1.1 S1.1 U1.39 | length 43.1
  Top Layer w0.3: U1.39 31.25,56.475 31.825,57.05 35.412,57.05 37.387,55.075 41.3,55.075 43.475,52.9 46.95,52.9 49.675,50.175 57.125,42.925 ; S1.1 57.125,42.925 ; H1.1 59.09,44.89 57.125,42.925
STATUS0: R6.2 U1.15 | length 3
  Top Layer w0.3: R6.2 28.75,68.25 U1.15
STATUS1: R7.2 U1.14 | length 3.4
  Top Layer w0.3: U1.14 29.25,67.25 R7.2
SWCLK: H1.2 U1.53 | length 22.4
  Top Layer w0.3: U1.53 v1(40.125,58.25) ; v2(54.6,50.05) 54.632,50.082 56.517,50.082 H1.2
  Bottom Layer w0.3: v1(40.125,58.25) 46.4,58.25 v2(54.6,50.05)
SWDIO: H1.4 U1.51 | length 21.2
  Top Layer w0.3: U1.51 51.725,57.25 56.32,52.655 H1.4 ; H1.4@57.06,52.69 H1.4@57.06,52.98
VBATT_IN: F1.1 H3.2 VBATT_IN.1 | length 10
  Top Layer w0.3: VBATT_IN.1@41.752,2.152 F1.1@45.45,5.85
  Top Layer w1.3: F1.1@45.45,5.85 45.6,5.7 H3.2
VBATT_OUT: BUCK.2 BUCK.3 C4.2 C8.2 C9.2 C10.2 C25.2 C26.2 H-Bridge_1.12 H-Bridge_2.12 Q1.2 R9.2 R15.2 VBATT_OUT.1 | length 29.3
  Top Layer w0.3: BUCK.3 21.374,26.072 R9.2 C4.2 ; VBATT_OUT.1 Q1.2@32.926,5.91 ; v1(38,29.7) v1@38.189,29.7 ; C26.2 38.668,31.232 38.668,30.178 ; v2(54.6,24.499) R15.2@54.6,25.874
  Top Layer w0.5: R9.2 23.367,26.3 v2(24.5,26.3)
  Top Layer w0.8: v1@38.189,29.7 38.668,30.178 C25.2 ; C9.2@43.598,22.327 C10.2@43.598,23.546 ; C10.2 43.6,24.62 v1(43.956,24.976)
  Top Layer w1: C4.2 v2(24.27,24.855)
  Top Layer w1.5: v2(26.507,11.36) 25.216,10.069 C8.2 29.132,7.486 30.517,6.1 Q1.2@32.918,6.1
VBUS: C32.2 R16.2 USB.1 | length 17.8
  Top Layer w0.3: R16.2 56.243,73.05 v2(57.093,72.2) ; C32.2 56.975,69 56.985,69 57.477,69.492 v2(57.554,69.492) 59.117,69.492 USB.1
  Bottom Layer w0.3: v2(57.093,72.2) 57.093,70.034 57.554,69.573 v2(57.554,69.492)
VCORE: C13.1 C15.1 C17.1 C19.1 L3.2 U1.8 U1.12 U1.24 U1.54 | length 33.8
  Top Layer w0.25: v3@32.25,67.05 U1.8 32.25,64.809 32.675,64.384 32.675,61.1 35.025,58.75 v2(36.225,58.75)
  Top Layer w0.3: C17.1 U1.24 28.449,60.25 30.25,62.051 U1.12 30.237,65.538 30.237,66.662 v2(30.225,66.675) ; v3(32.2,67.1) v3@32.25,67.05 ; v2(36.225,58.75) U1.54
  Bottom Layer w0.2: v2(30.225,66.675) 30.225,65.075 30.25,65.05 30.25,64.85 30.425,64.675 L3.2 L3.2@30.677,63.525 ; 30.925,63.525 30.925,63.514 31.389,63.05 32.211,63.05 32.675,63.514 32.675,64.529 32.821,64.675 32.874,64.675 32.874,65.399 C15.1
  Bottom Layer w0.3: v2(30.225,66.675) 31.694,66.675 32.119,67.1 v3(32.2,67.1) ; C19.1 35.3,58.75 v2(36.225,58.75)
pads on no net: 3V3_REG.4 3V3RF_REG.4 BUCK.6 H1.3 H1.9 H1.10 U1.3 U1.11 U1.13 U1.23 U1.33 U1.40 U1.49 U1.50 U1.52 U1.59 U1.63 USB.4 Y1.2 Y1.4

## Polygon pours and split planes (outlines as drawn)
GND on Top Layer "Top Layer-GND" (solid, remove dead copper, pour order 10): 26.187,85 64,85 64,0 0,0 0,68.631 21.35,68.65 26.162,73.362 26.162,85
GND on Top Layer "GND_TOP_LAYER" (solid, remove dead copper, pour order 8): -21.05,55.375
no net on Top Layer "Top Side-No Net" (solid, pour order 0): 17.536,36.019
GND on Bottom Layer "Bottom Layer-GND" (solid, remove dead copper, pour order 12): 26.164,85.001 64,85 64,0 0,0 0,68.631 21.35,68.65 26.162,73.362
GND on Bottom Layer "Bottom Side-GND 1" (solid, remove dead copper, pour order 2): 0,85
GND on Int1 (GND) (split plane): 63.49,0.51 0.51,0.51 0.51,68.631 21.35,68.65 26.162,73.362 26.162,84.49 63.49,84.49
3V3 on Int2 (PWR) (split plane): 63.49,30.992 23.741,30.992 23.091,31.642 23.091,45.907 23.081,45.956 23.053,45.998 14.492,54.559 21.421,61.488 21.449,61.53 21.459,61.58 21.459,68.631 21.449,68.68 21.422,68.721 26.162,73.362 26.162,84.49 63.49,84.49
VBATT_OUT on Int2 (PWR) (split plane): 63.49,0.51 4.279,0.51 4.279,2.369 23.053,21.143 23.081,21.185 23.091,21.234 23.091,30.083 23.741,30.733 63.49,30.733
3V3RF on Int2 (PWR) (split plane): 21.2,68.631 21.2,61.633 14.256,54.689 0.51,54.689 0.51,68.582 21.204,68.65
5V on Int2 (PWR) (split plane): 22.832,45.853 22.832,31.588 22.842,31.539 22.87,31.497 23.504,30.862 22.87,30.228 22.842,30.186 22.832,30.137 22.832,21.288 4.058,2.514 4.03,2.472 4.021,2.423 4.021,0.51 0.51,0.51 0.51,54.43 14.256,54.43

## Other copper
Top Layer:
  rectangle net NetH-Bridge_2_4: 46.875,29.475 47.675,30.4
  pour cut-out: 0,85 26.187,85 26.162,73.362 21.35,68.65 0,68.631
  region net NetH-Bridge_2_2: 47.087,28.45 47.087,28.175 46.831,28.175 46.481,27.975 46.067,27.975 46.029,28.004 45.883,28.112 45.788,28.209 45.725,28.3 45.7,28.342 45.675,28.375 45.675,28.425 45.7,28.45 45.725,28.5 45.788,28.55 45.865,28.589 45.862,28.775 46.353,28.775 46.513,28.525 46.663,28.525 46.785,28.45
  region net NetH-Bridge_2_2: 47.1,31.4 47.1,31.725 46.8,31.725 46.625,31.825 46.05,31.825 45.95,31.75 45.875,31.65 45.825,31.55 45.8,31.475 45.775,31.4 45.8,31.325 45.85,31.3 45.875,31.075 46.35,31.075 46.525,31.35 46.675,31.35 46.757,31.4
  region net NetH-Bridge_2_6: 47.4,31.075 47.4,30.775 47.7,30.775 47.825,30.675 48.17,30.675 48.689,29.92 48.9,29.725 49.075,29.65 49.3,29.65 49.3,30.45 48.425,31.15 47.825,31.15 47.702,31.075
  region net NetH-Bridge_2_3: 47.334,29.1 47.334,28.825 48,28.825 48.1,28.75 48.225,28.75 48.75,27.5 48.8,27.4 48.975,27.275 49.15,27.25 49.15,28.05 48.375,29.175 48.1,29.175 47.975,29.1
  region net NetH-Bridge_2_4: 47.675,29.775 47.675,29.475 47.975,29.475 48.1,29.35 48.462,29.35 49.044,28.546 49.175,28.475 49.618,28.475 49.618,29.275 49.075,29.275 48.375,29.85 48.1,29.85 47.977,29.775
  region net NetH-Bridge_2_2: 47.1,31.725 47.1,31.4 48.168,31.4 48.65,31.25 49.375,31.25 49.875,31.425 49.875,32.225 49.153,32.225 48.088,31.725
  region net NetH-Bridge_1_3: 42.15,15.275 42.15,15.725 42.05,15.875 41.075,16.35 41.25,17.15 41.375,17.125 41.5,17.075 41.575,17 41.825,16.475 42.375,16.15 42.45,15.997 42.45,15.275
  region net NetH-Bridge_1_6: 44.4,15.25 44.4,15.675 45.271,16.321 45.575,16.625 45.025,17.175 44.838,16.988 44.725,16.8 44.61,16.389 44.1,16 44.1,15.25
  region net NetH-Bridge_1_5: 43.75,14.65 43.75,14.1 44.568,13.201 44.875,13 45.175,12.9 45.625,12.9 45.625,12.125 45.276,12.125 45.05,12.25 43.45,13.85 43.45,14.65
  region net NetH-Bridge_1_5: 43.6,14.236
  region net NetH-Bridge_1_7: 45.05,14.687 44.75,14.687 44.75,14.3 44.625,14.012 44.625,13.5 45.175,13.5 45.175,14 45.05,14.3
  region net NetH-Bridge_1_4: 43.1,14.587 42.8,14.587 42.8,14.2 42.6,13.912 42.6,13.375 43.3,13.375 43.3,13.912 43.1,14.2
  region net VBATT_OUT: 41.875,30.125 41.875,30.413 41.125,30.413 40.85,30.575 39.575,30.575 39.572,29.775 40.1,29.775 40.979,30.125
  region net NetH-Bridge_1_2: 41.8,14.687 41.5,14.687 41.5,14.3 41.3,14.012 41.3,13.475 42,13.475 42,14.012 41.8,14.3
  region net GND: 3.607,64.491 3.607,64.516 3.607,66.142 3.81,66.142 3.861,66.091 3.861,65.583 4.166,65.278 4.166,64.491
  region net NetC1_2: 2.743,64.44 2.743,64.465 2.743,66.091 2.54,66.091 2.489,66.04 2.489,65.532 2.184,65.227 2.184,64.44
  pour cut-out: 15.57,24.333
  region net GND: 26.921,32.264 26.921,32.416 26.692,32.416 25.865,32.416 25.865,32.086 26.379,32.086 26.671,32.264
  region net 5V: 26.996,33.364 26.996,33.516 26.767,33.516 25.94,33.516 25.94,33.186 26.454,33.186 26.746,33.364
  region net VBATT_OUT: 22.083,24.93 22.083,24.778 22.312,24.778 23.139,24.778 23.139,25.108 22.625,25.108 22.333,24.93
  region net VBATT_OUT: 51.436,35.434
  region net VBATT_OUT: 51.525,36.425
  region net VBATT_OUT: 43.459,21.107 43.739,21.107 43.739,21.577 43.815,21.666 43.815,22.123 43.383,22.123 43.383,21.666 43.459,21.584
  region net VBATT_OUT: 22.664,25.03
  region: 22.225,24.943
  region net VBATT_OUT: 22.377,24.943
  region net VBATT_OUT: 22.454,24.943
  region net VBATT_OUT: 22.377,24.867
  region net VBATT_OUT: 22.454,24.867
  region: 22.377,24.79 22.454,24.714
  pour cut-out: 0.3,84.4
Bottom Layer:
  region: 0.5,84.5
Int1 (GND) (plane layer: these items are gaps in the copper):
  pour cut-out: 0,85 26.162,85 26.162,73.362 21.35,68.65 0,68.631
  pour cut-out: 0,85 26.162,85 26.162,73.383 21.35,68.65 0,68.631
Int2 (PWR) (plane layer: these items are gaps in the copper):
  pour cut-out: 0,85 26.162,85 26.162,73.362 21.35,68.65 0,68.58
  region: 13.606,77.731
  lines w0.254: -0.025,54.559 14.309,54.559 ; 0.025,54.559 12.884,54.559 ; 4.15,-0.025 4.15,2.423 22.962,21.234 22.962,30.137 23.687,30.862 ; 21.33,68.631 21.33,61.58 14.309,54.559 ; 26.5,85.001 26.164,85.001 26.162,85 31.33,85 31.344,85.014 ; 31.394,84.938 53.416,84.938 63.938,84.938 63.983,84.893 63.983,75.438 ; 61.495,69.941 61.545,69.992 ; 64,30.862 23.687,30.862 ; 14.309,54.559 22.962,45.907 22.962,31.588 23.687,30.862

## Silkscreen, mask and mechanical layers (free items; w line width, h text height)
Top Overlay:
  text "ENCE461" at 1.425,4.75 h1
  text "Group 10" at 4.325,2.825 h1
  text "F1 RACER" at 8.575,0.9 h1
Bottom Overlay:
  text "Marcus | Nathan | Hassan | Abdullah" at 39.975,1.325 h2.54
Board Outline:
  lines w0.254: 0.05,0 64,0 64,85 0.05,85 0.05,0

## Dimensions
0,86 to 64,86 on Mechanical 1
65,85 to 65,0 on Mechanical 1

## Text inside footprints (layer, text, board x,y; h text height)
BUCK: Mechanical 13 "*" at 20.93,24.344 h0.5 r180
CH1: Top Overlay "1" at 28.799,76.198 h0.5 r90
CH4: Top Overlay "1" at 49.132,76.214 h0.5 r90
H1: Top Overlay "9" at 59.84,61.475 h0.5 r90; Top Overlay "10" at 57.3,61.475 h0.5 r90; Top Overlay "1" at 59.84,48.415 h0.5 r90; Top Overlay "2" at 57.3,47.915 h0.5 r90
nRF24: Top Overlay "NO GND/ / POWER / PLANES / UNDER / OR NEARBY" at 2.078,69.914 h0.5
USB: Mechanical 1 "PCB Edge" at 64.12,68.675 h0.5 r90